# Altium PCB PCB2.PcbDoc
Units mm, origin at the board's own origin, x right, y up, seen from the top; angles counter-clockwise.
Board outline 90.55 x 93.75 mm, 2 copper layers (Top Layer, Bottom Layer); 34 components, 48 nets, 411 pads, 57 vias.
Unrouted connection lines stored in the file: 1.
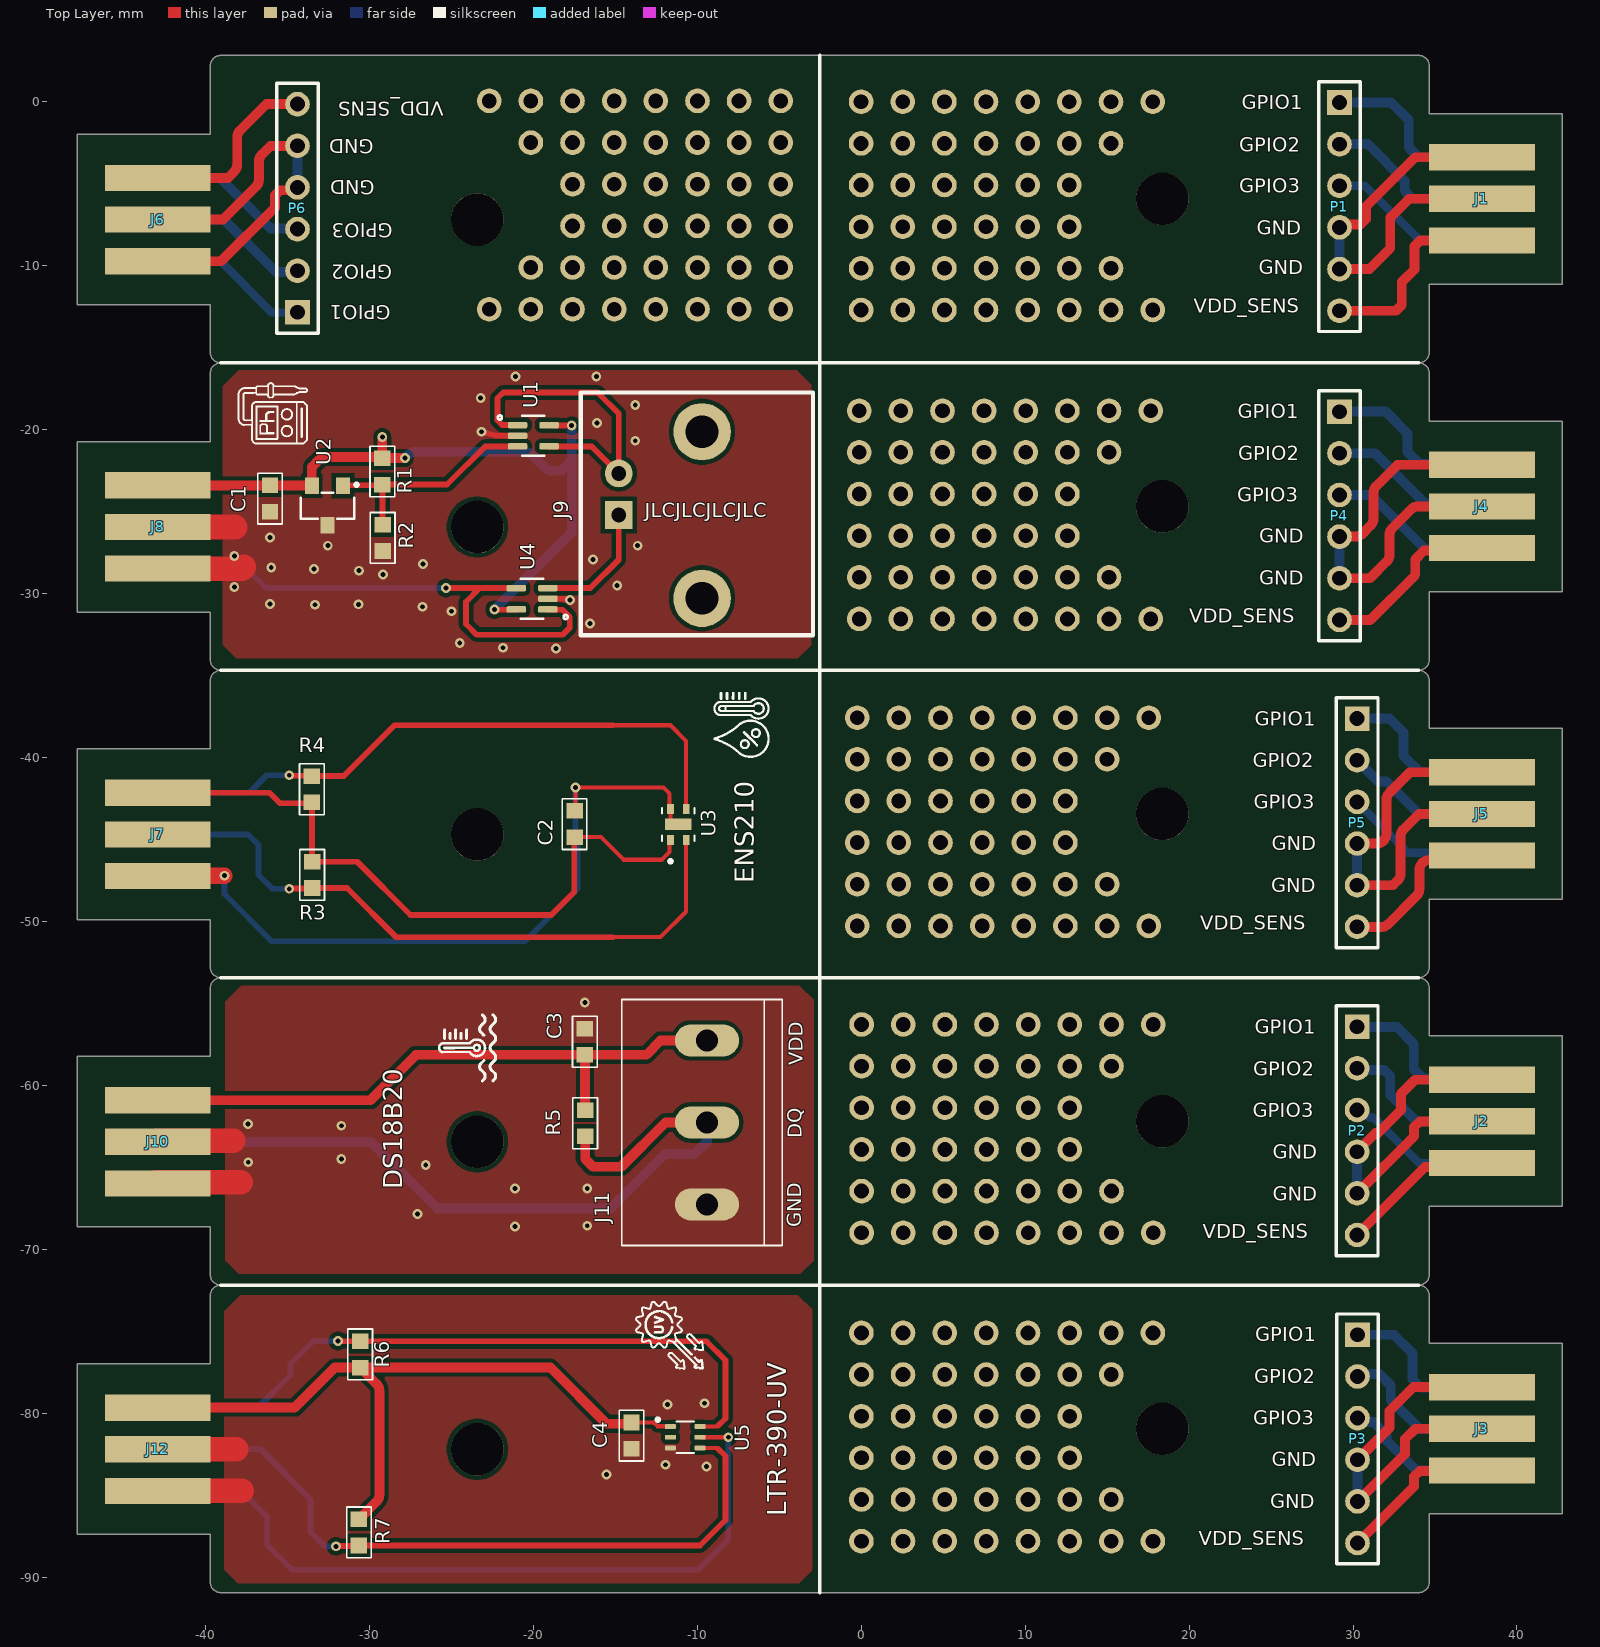
[diagram p0: Top Layer view]
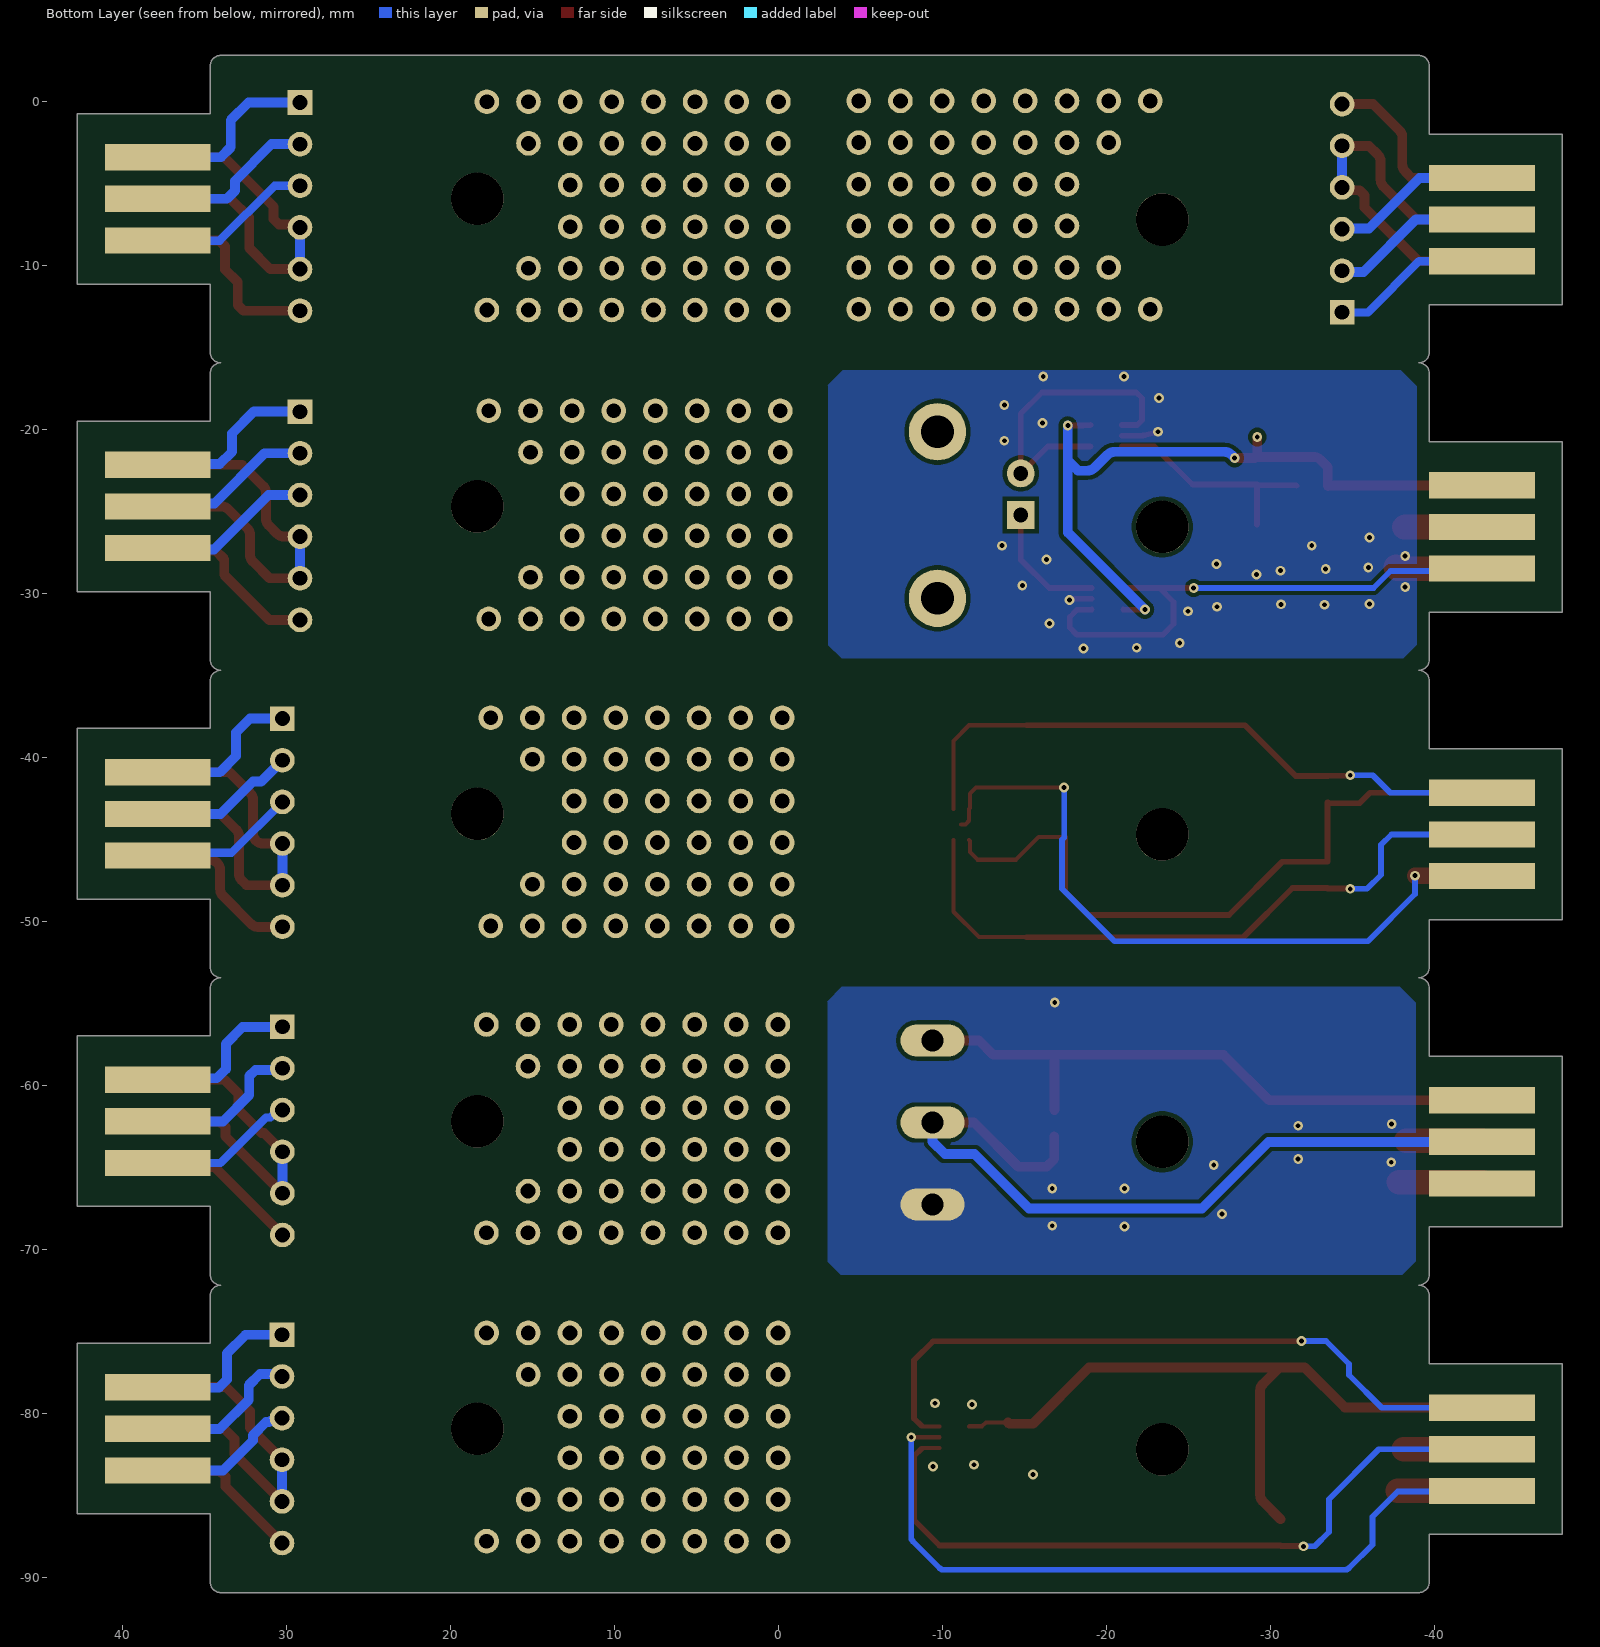
[diagram p1: Bottom Layer view, seen from below]
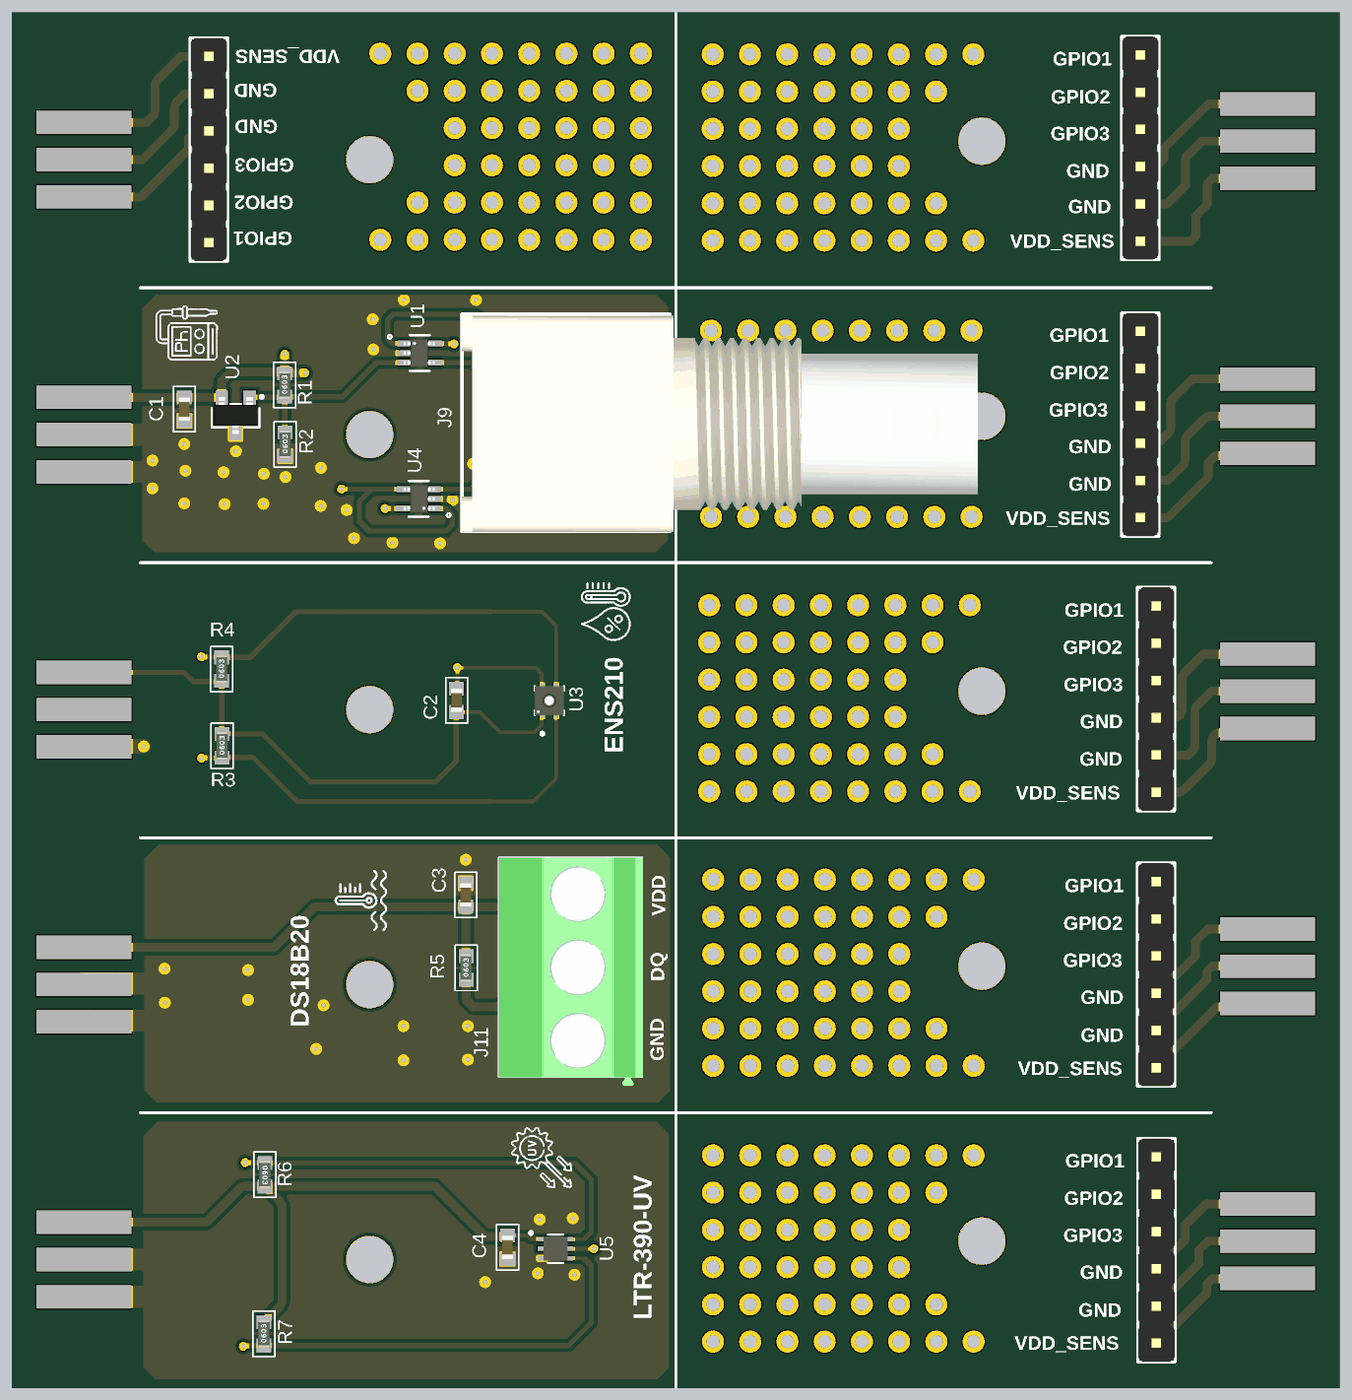
[diagram p2: 3D render of the assembled board from above, using the file's embedded part models]

## Layer stack, top to bottom
Top Solder: solder mask 0.0102, Solder Resist, Dk 3.5
Top Layer: signal copper 0.0356
Dielectric 1: dielectric 0.32, FR-4, Dk 4.8
Bottom Layer: signal copper 0.0356
Bottom Solder: solder mask 0.0102, Solder Resist, Dk 3.5

## Board outline
-47.796,-87.373 -39.696,-87.373 -39.696,-90.273 ccw(c-39.046,-90.273) -39.046,-90.923 -2.521,-90.923 34.004,-90.923 ccw(c34.004,-90.273) 34.654,-90.273 34.654,-86.123 42.754,-86.123 42.754,-75.723 34.654,-75.723 34.654,-72.823 ccw(c34.004,-72.823) 34.004,-72.173 ccw(c34.004,-71.523) 34.654,-71.523 34.654,-67.373 42.754,-67.373 42.754,-56.973 34.654,-56.973 34.654,-54.073 ccw(c34.004,-54.073) 34.004,-53.423 ccw(c34.004,-52.773) 34.654,-52.773 34.654,-48.623 42.754,-48.623 42.754,-38.223 34.654,-38.223 34.654,-35.323 ccw(c34.004,-35.323) 34.004,-34.673 ccw(c34.004,-34.023) 34.654,-34.023 34.654,-29.873 42.754,-29.873 42.754,-19.473 34.654,-19.473 34.654,-16.573 ccw(c34.004,-16.573) 34.004,-15.923 ccw(c34.004,-15.273) 34.654,-15.273 34.654,-11.123 42.754,-11.123 42.754,-0.723 34.654,-0.723 34.654,2.177 ccw(c34.004,2.177) 34.004,2.827 -2.521,2.827 -39.046,2.827 ccw(c-39.046,2.177) -39.696,2.177 -39.696,-1.973 -47.796,-1.973 -47.796,-12.373 -39.696,-12.373 -39.696,-15.273 ccw(c-39.046,-15.273) -39.046,-15.923 ccw(c-39.046,-16.573) -39.696,-16.573 -39.696,-20.723 -47.796,-20.723 -47.796,-31.123 -39.696,-31.123 -39.696,-34.023 ccw(c-39.046,-34.023) -39.046,-34.673 ccw(c-39.046,-35.323) -39.696,-35.323 -39.696,-39.473 -47.796,-39.473 -47.796,-49.873 -39.696,-49.873 -39.696,-52.773 ccw(c-39.046,-52.773) -39.046,-53.423 ccw(c-39.046,-54.073) -39.696,-54.073 -39.696,-58.223 -47.796,-58.223 -47.796,-68.623 -39.696,-68.623 -39.696,-71.523 ccw(c-39.046,-71.523) -39.046,-72.173 ccw(c-39.046,-72.823) -39.696,-72.823 -39.696,-76.973 -47.796,-76.973

## Design rules (kind name [scope] priority, off if disabled: settings)
Clearance [All] p1: gap=0.254 ignorepadtopadclearanceinfootprint=FALSE except(0: Arc-Hole Track-Hole SMDPad-Hole THPad-Hole Via-Hole Fill-Hole Poly-Hole Region-Hole Text-Hole)
PlaneConnect [All] p1: planeconnectstyle=Direct reliefexpansion=0.508 reliefentries=4 reliefconductorwidth=0.254 reliefairgap=0.254
PolygonConnect [All] p1: connectstyle=Direct reliefconductorwidth=0.254 reliefentries=4 polygonreliefangle="90 Angle" airgapwidth=0.254
RoutingVias [All] p1: holewidth=0.711 width=1.27 viastyle="Through Hole" minholewidth=0.711 minwidth=1.27 maxholewidth=0.711 maxwidth=1.27
SolderMaskExpansion [All] p1: expansion=0.102 istentingtop=FALSE
Width [All] p1: maxlimit=5 minlimit=0.2 preferedwidth=0.254 bottomlayer_minwidth=0.254 minimp=50.000000 maximp=50.000000 favimp=50.000000
29 further rules are at their usual default settings.

## Classes and differential pairs
component class Sensors: C1 C2 C3 C4 J7 J8 J9 J10 J11 J12 R1 R2 R3 R4 R5 R6 R7 U1 U2 U3 U4 U5
component class Blank: J1 J2 J3 J4 J5 J6 P1 P3 P4 P5 P6

## Components (designator, comment, footprint, x,y, rotation, side; value= is the part's Value field where it differs from the comment)
C1 "100nF" C0603 -36.05,-24.2 r90 top
C2 "100nF" C0603 -17.475,-44.05 r270 top
C3 "100nF" C0603 -16.85,-57.325 r270 top
C4 "100nF" C0603 -14,-81.35 r90 top
J1 "Card Edge" "CARD EDGE" 37.854,-5.92 r180 top
J2 "Card Edge" "CARD EDGE" 37.854,-62.183 r180 top
J3 "Card Edge" "CARD EDGE" 37.854,-80.933 r180 top
J4 "Card Edge" "CARD EDGE" 37.854,-24.683 r180 top
J5 "Card Edge" "CARD EDGE" 37.854,-43.433 r180 top
J6 "Card Edge" "CARD EDGE" -42.896,-7.183 r0 top
J7 "Card Edge" "CARD EDGE" -42.896,-44.683 r0 top
J8 "Card Edge" "CARD EDGE" -42.896,-25.933 r0 top
J9 "CON-BNC" CON_BNC_MOLEX_0731375003 -12.24,-25.205 r90 top
J10 "Card Edge" "CARD EDGE" -42.896,-63.433 r0 top
J11 "Pluggable_Connector" 5mm_screw_terminal_3_pos -9.4,-67.25 r90 top
J12 "Card Edge" "CARD EDGE" -42.896,-82.183 r0 top
P1 "Header 1X6" HEADER_1x6_2.54 29.175,-0.045 r270 top
P2 "Header 1X6" HEADER_1x6_2.54 30.25,-56.41 r270 top
P3 "Header 1X6" HEADER_1x6_2.54 30.275,-75.2 r270 top
P4 "Header 1X6" HEADER_1x6_2.54 29.175,-18.9 r270 top
P5 "Header 1X6" HEADER_1x6_2.54 30.25,-37.62 r270 top
P6 "Header 1X6" HEADER_1x6_2.54 -34.375,-12.845 r90 top
R1 "100k" R0603 -29.2,-22.55 r90 top
R2 "33.2k" R0603 -29.175,-26.6 r90 top
R3 "4.7k" R0603 -33.475,-47.15 r90 top
R4 "4.7k" R0603 -33.5,-41.925 r90 top
R5 "4k7" R0603 -16.825,-62.3 r90 top
R6 "4k7" R0603 -30.55,-76.4 r270 top
R7 "4k7" R0603 -30.625,-87.25 r90 top
U1 "LPV521" SOT65P210X110-5N -19.99,-20.37 r0 top
U2 "ADR5040BKSZ-REEL7" SOT23-3 -32.55,-24.625 r180 top
U3 "ENS210-LQFM" XDCR_ENS210-LQFM -11.15,-44.075 r90 top
U4 "LPV521" SOT65P210X110-5N -20.065,-30.311 r180 top
U5 "LTR-390UV-01" LTR390-UV -9.825,-80.8 r0 top

## Footprints (in the part's own frame and the unit in brackets; to place one, negate y for a bottom-side part, rotate by r counter-clockwise, add the part's x,y. Pads: shape width x height; smd on the part's side, far side on the other; paste and mask are expansions set on the pad)
5mm_screw_terminal_3_pos [mm]
  oval 1.95x3.9 hole 1.35: 1(0,0) 2(5,0) 3(10,0)
  silkscreen extent -2.5,-4.6 12.5,5.2, body extent -3.09,-4.64 12.48,5.21, height 13.9
C0603 [mm] "Chip Capacitor; Body 1.6 x 0.8 mm (LxW typ)"
  rect 0.95x1 smd mask+0.05: 1(-0.8,0) 2(0.8,0)
  silkscreen extent -1.55,-0.75 1.55,0.75, body extent -0.8,-0.4 0.8,0.4, height 0.8
"CARD EDGE" [mm]
  rect 6.46x1.6 smd far side: 1(0,-2.54) 2(0,0) 3(0,2.54)
  rect 6.46x1.6 smd: 4(0,2.54) 5(0,0) 6(0,-2.54)
CON_BNC_MOLEX_0731375003 [mm]
  rect 1.7x1.7 hole 0.9: 1(0,2.54)
  round 1.7 hole 0.9: 2(2.54,2.54)
  round 3.5 hole 2: MH(-5.08,-2.54) MH(5.08,-2.54)
  silkscreen extent -7.33,-9.3 7.47,4.86, body extent -7.38,-30.32 7.38,4.86, height 13.25
HEADER_1x6_2.54 [mm] "Connector; Header; 6 Position"
  rect 1.5x1.5 hole 0.9: 1(0,0)
  round 1.5 hole 0.9: 2(2.54,0) 3(5.08,0) 4(7.62,0) 5(10.16,0) 6(12.7,0)
  silkscreen extent -1.27,-1.27 13.97,1.27, body extent -1.27,-1.24 13.97,1.25, height 8.54
LTR390-UV [mm]
  rrect25% 0.65x0.3 smd: 1(-1.8,0) 2(-1.8,-0.65) 3(-1.8,-1.3) 4(0,-1.3) 5(0,-0.65) 6(0,0)
  silkscreen extent -2.67,-1.61 -0.37,0.52, body extent -1.73,-1.47 -0.08,0.18, height 0.7
R0603 [mm] "Chip Resistor; Body 1.6 x 0.8 mm (LxW typ)"
  rect 0.95x1 smd mask+0.05: 1(-0.8,0) 2(0.8,0)
  silkscreen extent -1.55,-0.75 1.55,0.75, body extent -1,-0.39 1,0.39, height 0.79
SOT23-3 [mm] "SOT-23; 3 Leads; Body 3.0 x 2.5 mm, inc. leads (LxW max)"
  rect 0.85x1 smd: 1(0.95,-1.2) 2(-0.95,-1.2) 3(0,1.2)
  silkscreen extent -1.88,-1.37 1.63,0.81, body extent -1.5,-1.25 1.5,1.25, height 1.05
SOT65P210X110-5N [mm]
  rrect50% 1.19x0.4 smd: 1(-0.96,0.65) 2(-0.96,0) 3(-0.96,-0.65) 4(0.96,-0.65) 5(0.96,0.65)
  silkscreen extent -2.17,-1.22 0.68,1.24, body extent -1.08,-1 1.02,1, height 1.1
XDCR_ENS210-LQFM [mm]
  rect 0.6x0.4 smd paste-0.05 mask+0.05: 1(-0.95,0.475) 2(-0.95,-0.475) 3(0.95,-0.475) 4(0.95,0.475)
  rect 0.7x1.6 smd paste-2 mask+0.05: 5(0,0)
  silkscreen extent -2.35,-1 1,1, body extent -1,-1 1,1, height 0.8

## Part data
C1 C2 C3 C4: library part CAP_0603, "Capacitor SMD 0603"
J1 J2 J3 J4 J5 J6 J7 J8 J10 J12: "Card Edge pads for 2.54 mm pitch edge connector"
J9: "RF Connector BNC Female 50 Ohms PCB TH Mount", Manufacturer="RF Solutions", Manufacturer Part Number=CON-SMA-EDGE-S
J11: "Screw terminal or plug terminal"
P1 P2 P3 P4 P5 P6: "Header,6-Pin, Single row", LatestRevisionDate=17-Jul-2002, LatestRevisionNote="Re-released for DXP Platform.", Publisher="Altium Limited"
R1 R2 R3 R4: library part RES_0603, "Resistor SMD 0603"
R5 R6 R7: library part RES_0805, "Resistor SMD 0805"
U1 U4: Package=None, Availability=Unavailable, MP=MAX4466EXK, Price=None
U2: library part VREF, "Voltage References 2.048 Low-Cost, Micropower, Low-Dropout, High-Output-Current, SOT23", Manufacturer="Maxim Integrated", Manufacturer Part Number=MAX6101EUR+T
U3: "Humidity/Temperature Sensor Digital Serial (2-Wire, I2C) 4-Pin QFN EP T/R", Package="NON STANDARD-5 ScioSense", Check_prices=https://www.snapeda.com/parts/ENS210-LQFM/ScioSense/view-part/?ref=eda, MF=ScioSense, MP=ENS210-LQFM, SnapEDA_Link=https://www.snapeda.com/parts/ENS210-LQFM/ScioSense/view-part/?ref=snap
U5: "SENSOR OPT ULTRAVIOLET 6PINS", Manufacturer_Name=Lite-On, Mouser Part Number=859-LTR390UV01, Arrow Part Number=LTR-390UV-01, Arrow Price/Stock=https://www.arrow.com/en/products/ltr-390uv-01/lite-on-technology?region=nac, Datasheet Link=https://www.arrow.com/en/products/ltr-390uv-01/lite-on-technology, Geometry.Height=0.9mm, Manufacturer_Part_Number=LTR-390UV-01, Mouser Price/Stock=https://www.mouser.co.uk/ProductDetail/Lite-On/LTR-390UV-01?qs=g5ciJ0jwZaECcUd5i6p7%252Bg%3D%3D

## Free pads (board coordinates)
  round 1.5 hole 0.9: 6(-4.9,-12.65) 6(-0.239,-37.563) 6(-0.119,-18.842) 6(0,0) 6(0.018,-75.083) 6(0.03,-56.274) 7(-4.9,-10.11) 7(-0.239,-40.103) 7(-0.119,-21.382) 7(0,-2.54) 7(0.018,-77.623) 7(0.03,-58.814) 8(-4.9,-7.57) 8(-0.239,-42.643) 8(-0.119,-23.922) 8(0,-5.08) 8(0.018,-80.163) 8(0.03,-61.354) 9(-4.9,-5.03) 9(-0.239,-45.183) 9(-0.119,-26.462) 9(0,-7.62) 9(0.018,-82.703) 9(0.03,-63.894) 10(-4.9,-2.49) 10(-0.239,-47.723) 10(-0.119,-29.002) 10(0,-10.16) 10(0.018,-85.243) 10(0.03,-66.434) 11(-4.9,0.05) 11(-0.239,-50.263) 11(-0.119,-31.542) 11(0,-12.7) 11(0.018,-87.783) 11(0.03,-68.974) 12(-7.44,-12.65) 12(2.301,-37.563) 12(2.421,-18.842) 12(2.54,0) 12(2.558,-75.083) 12(2.57,-56.274) 13(-7.44,-10.11) 13(2.301,-40.103) 13(2.421,-21.382) 13(2.54,-2.54) 13(2.558,-77.623) 13(2.57,-58.814) 14(-7.44,-7.57) 14(2.301,-42.643) 14(2.421,-23.922) 14(2.54,-5.08) 14(2.558,-80.163) 14(2.57,-61.354) 15(-7.44,-5.03) 15(2.301,-45.183) 15(2.421,-26.462) 15(2.54,-7.62) 15(2.558,-82.703) 15(2.57,-63.894) 16(-7.44,-2.49) 16(2.301,-47.723) 16(2.421,-29.002) 16(2.54,-10.16) 16(2.558,-85.243) 16(2.57,-66.434) 17(-7.44,0.05) 17(2.301,-50.263) 17(2.421,-31.542) 17(2.54,-12.7) 17(2.558,-87.783) 17(2.57,-68.974) 18(-9.98,0.05) 18(4.841,-50.263) 18(4.961,-31.542) 18(5.08,-12.7) 18(5.098,-87.783) 18(5.11,-68.974) 19(-9.98,-2.49) 19(4.841,-47.723) 19(4.961,-29.002) 19(5.08,-10.16) 19(5.098,-85.243) 19(5.11,-66.434) 20(-9.98,-5.03) 20(4.841,-45.183) 20(4.961,-26.462) 20(5.08,-7.62) 20(5.098,-82.703) 20(5.11,-63.894) 21(-9.98,-7.57) 21(4.841,-42.643) 21(4.961,-23.922) 21(5.08,-5.08) 21(5.098,-80.163) 21(5.11,-61.354) 22(-9.98,-10.11) 22(4.841,-40.103) 22(4.961,-21.382) 22(5.08,-2.54) 22(5.098,-77.623) 22(5.11,-58.814) 23(-9.98,-12.65) 23(4.841,-37.563) 23(4.961,-18.842) 23(5.08,0) 23(5.098,-75.083) 23(5.11,-56.274) 24(-12.52,-12.65) 24(7.381,-37.563) 24(7.501,-18.842) 24(7.62,0) 24(7.638,-75.083) 24(7.65,-56.274) 25(-12.52,-10.11) 25(7.381,-40.103) 25(7.501,-21.382) 25(7.62,-2.54) 25(7.638,-77.623) 25(7.65,-58.814) 26(-12.52,-7.57) 26(7.381,-42.643) 26(7.501,-23.922) 26(7.62,-5.08) 26(7.638,-80.163) 26(7.65,-61.354) 27(-12.52,-5.03) 27(7.381,-45.183) 27(7.501,-26.462) 27(7.62,-7.62) 27(7.638,-82.703) 27(7.65,-63.894) 28(-12.52,-2.49) 28(7.381,-47.723) 28(7.501,-29.002) 28(7.62,-10.16) 28(7.638,-85.243) 28(7.65,-66.434) 29(-12.52,0.05) 29(7.381,-50.263) 29(7.501,-31.542) 29(7.62,-12.7) 29(7.638,-87.783) 29(7.65,-68.974) 30(-15.06,0.05) 30(9.921,-50.263) 30(10.041,-31.542) 30(10.16,-12.7) 30(10.178,-87.783) 30(10.19,-68.974) 31(-15.06,-2.49) 31(9.921,-47.723) 31(10.041,-29.002) 31(10.16,-10.16) 31(10.178,-85.243) 31(10.19,-66.434) 32(-15.06,-5.03) 32(9.921,-45.183) 32(10.041,-26.462) 32(10.16,-7.62) 32(10.178,-82.703) 32(10.19,-63.894) 33(-15.06,-7.57) 33(9.921,-42.643) 33(10.041,-23.922) 33(10.16,-5.08) 33(10.178,-80.163) 33(10.19,-61.354) 35(-15.06,-10.11) 35(9.921,-40.103) 35(10.041,-21.382) 35(10.16,-2.54) 35(10.178,-77.623) 35(10.19,-58.814) 36(-15.06,-12.65) 36(9.921,-37.563) 36(10.041,-18.842) 36(10.16,0) 36(10.178,-75.083) 36(10.19,-56.274) 37(-17.6,-12.65) 37(12.461,-37.563) 37(12.581,-18.842) 37(12.7,0) 37(12.718,-75.083) 37(12.73,-56.274) 38(-17.6,-10.11) 38(12.461,-40.103) 38(12.581,-21.382) 38(12.7,-2.54) 38(12.718,-77.623) 38(12.73,-58.814) 39(-17.6,-7.57) 39(12.461,-42.643) 39(12.581,-23.922) 39(12.7,-5.08) 39(12.718,-80.163) 39(12.73,-61.354) 40(-17.6,-5.03) 40(12.461,-45.183) 40(12.581,-26.462) 40(12.7,-7.62) 40(12.718,-82.703) 40(12.73,-63.894) 42(-17.6,-2.49) 42(12.461,-47.723) 42(12.581,-29.002) 42(12.7,-10.16) 42(12.718,-85.243) 42(12.73,-66.434) 43(-17.6,0.05) 43(12.461,-50.263) 43(12.581,-31.542) 43(12.7,-12.7) 43(12.718,-87.783) 43(12.73,-68.974) 44(-20.14,0.05) 44(15.001,-50.263) 44(15.121,-31.542) 44(15.24,-12.7) 44(15.258,-87.783) 44(15.27,-68.974) 45(-20.14,-2.49) 45(15.001,-47.723) 45(15.121,-29.002) 45(15.24,-10.16) 45(15.258,-85.243) 45(15.27,-66.434) 49(-20.14,-10.11) 49(15.001,-40.103) 49(15.121,-21.382) 49(15.24,-2.54) 49(15.258,-77.623) 49(15.27,-58.814) 50(-20.14,-12.65) 50(15.001,-37.563) 50(15.121,-18.842) 50(15.24,0) 50(15.258,-75.083) 50(15.27,-56.274) 52(-22.68,-12.65) 52(17.541,-37.563) 52(17.661,-18.842) 52(17.78,0) 52(17.798,-75.083) 52(17.81,-56.274) 57(-22.68,0.05) 57(17.541,-50.263) 57(17.661,-31.542) 57(17.78,-12.7) 57(17.798,-87.783) 57(17.81,-68.974)
  round 3.2 hole 3.2: 59(-23.408,-7.183) 60(-23.408,-25.933) 61(-23.408,-44.683) 62(-23.408,-63.433) 63(-23.408,-82.183) 65(18.365,-5.92) 66(18.365,-24.683) 67(18.365,-43.433) 68(18.365,-62.183) 69(18.365,-80.933)

## Via types
v1: diameter 0.6, hole 0.3, Top Layer to Bottom Layer, 57 vias

## Nets (pads, with @x,y where several pads share a name; then routed paths per layer and width w, separated by ;. In a path a pad name is that pad's centre, name@x,y a point inside that pad or via, vN(x,y) a via of type N, cw(c..) or ccw(c..) an arc to the next point about the centre after c; other vN are vias at no path point)
DQ: J10.2 J11.2 R5.1 | length 48.2
  Top Layer w0.6: R5.1 -16.825,-64.475 -16.35,-64.95 -14.625,-64.95 -11.925,-62.25 J11.2
  Bottom Layer w0.6: J10.2 -29.892,-63.433 -25.825,-67.5 -15.275,-67.5 -11.95,-64.175 -10.15,-64.175 -9.4,-63.425 J11.2
GND_EXP1: J1.5 J1.6 P1.4 P1.5 | length 25
  Top Layer w0.6: P1.5 30.995,-10.205 32.275,-8.925 32.275,-7.05 33.405,-5.92 J1.5 ; P1.4 29.347,-7.493 30.449,-7.493 30.8,-7.141 30.8,-6.4 33.82,-3.38 J1.6
  Bottom Layer w0.6: P1.5 P1.4
GND_EXP2: J2.5 J2.6 P2.4 P2.5 | length 22.3
  Top Layer w0.6: P2.5 33.725,-63.095 33.725,-62.534 34.076,-62.183 J2.5 ; P2.4 31.38,-62.9 31.525,-62.9 32.925,-61.5 32.925,-60.5 33.782,-59.643 J2.6
  Bottom Layer w0.6: P2.5 P2.4
GND_EXP3: J3.5 J3.6 P3.4 P3.5 | length 22.5
  Top Layer w0.6: P3.5 33.175,-82.46 33.175,-81.55 33.792,-80.933 J3.5 ; P3.4 32.225,-80.87 32.225,-79.85 33.682,-78.393 J3.6
  Bottom Layer w0.6: P3.5 P3.4
GND_EXP4: J4.5 J4.6 P4.4 P4.5 | length 25.6
  Top Layer w0.6: P4.5 31.04,-29.06 32.049,-28.051 ccw(c31.625,-27.626) 32.225,-27.626 32.225,-26.424 cw(c32.825,-26.424) 32.401,-25.999 33.542,-24.858 cw(c33.966,-25.283) 33.966,-24.683 J4.5 ; P4.4 30.156,-26.52 ccw(c30.156,-25.92) 30.58,-26.345 31.074,-25.851 ccw(c30.65,-25.426) 31.25,-25.426 31.25,-23.849 cw(c31.85,-23.849) 31.426,-23.424 32.707,-22.143 J4.6
  Bottom Layer w0.6: P4.5 P4.4
GND_EXP5: J5.5 J5.6 P5.4 P5.5 | length 24.3
  Top Layer w0.6: P5.5 32.445,-47.78 32.724,-47.501 ; P5.4 31.435,-45.24 ccw(c31.435,-44.64) 32.035,-44.64 32.035,-42.589 cw(c32.635,-42.589) 32.211,-42.164 33.482,-40.893 J5.6 ; 32.724,-47.501 ccw(c32.3,-47.076) 32.9,-47.076 32.9,-44.799 cw(c33.5,-44.799) 33.076,-44.374 34.017,-43.433 J5.5
  Bottom Layer w0.6: P5.5 P5.4
GND_EXP6: J6.5 J6.6 P6.4 P6.5 | length 24.6
  Top Layer w0.6: J6.6 -39.023,-9.723 -35.75,-6.45 -35.75,-5.7 -35.447,-5.397 -34.547,-5.397 P6.4 ; J6.5 -38.908,-7.183 -36.901,-5.176 ccw(c-37.325,-4.751) -36.725,-4.751 -36.725,-3.649 cw(c-36.125,-3.649) -36.549,-3.224 -36.025,-2.7 -34.39,-2.7 P6.5
  Bottom Layer w0.6: P6.4 P6.5
GND_SENS1: C1.1 J8.5 J8.6 R2.1 U1.2 U2.3 U4.2 | length 13.6
  Top Layer w0.35: v1(-23.15,-20.125) -22.248,-20.359 ccw(c-22.16,-20.02) -22.16,-20.37 U1.2 ; U4.2 -17.897,-30.311 -17.818,-30.39 v1(-17.75,-30.39)
  Top Layer w1.5: J8.6 -37.748,-28.473 -37.65,-28.375 ; J8.5 -38.192,-25.933 -38.175,-25.95
  other v1: -18.6,-33.35 -21.85,-33.3 -24.475,-33 -16.525,-31.825 -24.975,-31.075 -26.75,-30.8 -33.3,-30.675 -30.65,-30.65 -36.05,-30.625 -38.225,-29.6 -14.875,-29.5 -29.15,-28.825 -30.625,-28.6 -33.375,-28.5 -35.975,-28.4 -26.725,-28.2 -16.35,-27.925 -38.225,-27.7 -32.525,-27.075 -13.625,-27.075 -36.05,-26.575 -13.775,-20.675 -16.1,-19.6 -13.775,-18.5 -23.2,-18.075 -21.075,-16.75 -16.15,-16.75
GND_SENS3: C2.1 J7.5 J7.6 U3.4 U3.5 | length 45.1
  Top Layer w0.25: C2.1 -17.425,-43.2 v1(-17.425,-41.825) -12.05,-41.825 -11.675,-42.2 -11.675,-43.075 U3.4 -11.625,-43.85 -11.4,-44.075 U3.5
  Top Layer w1: J7.6 -42.874,-47.2 v1(-38.825,-47.2)
  Bottom Layer w0.35: v1(-38.825,-47.2) -38.825,-48.325 -35.95,-51.2 -20.5,-51.2 -17.3,-48 -17.3,-45.009 -17.425,-44.884 v1(-17.425,-41.825)
GND_SENS4: C3.1 J10.5 J10.6 J11.1 | length 9.9
  Top Layer w1.5: J10.6@-42.996,-65.898 -37.848,-65.898 ; J10.5@-42.996,-63.358 -38.292,-63.358
  other v1: -21.1,-68.6 -16.7,-68.55 -27.05,-67.825 -21.1,-66.275 -16.7,-66.275 -26.55,-64.85 -37.375,-64.675 -31.7,-64.475 -31.7,-62.45 -37.4,-62.35 -16.85,-54.925
GND_SENS5: C4.1 J12.5 J12.6 U5.3 | length 9.9
  Top Layer w1.5: J12.6 -37.776,-84.723 ; J12.5 -38.125,-82.183
  other v1: -15.525,-83.725 -9.425,-83.225 -11.925,-83.125 -11.8,-79.45 -9.55,-79.375
GPIO1_EXP1: J1.1 P1.1 | length 11
  Bottom Layer w0.6: P1.1 32.32,-0.045 33.4,-1.125 33.4,-2.775 34.005,-3.38 J1.1
GPIO1_EXP2: J2.1 P2.1 | length 9.9
  Bottom Layer w0.6: P2.1 30.265,-56.425 32.675,-56.425 33.7,-57.45 33.7,-59 34.25,-59.55 37.761,-59.55 J2.1
GPIO1_EXP3: J3.1 P3.1 | length 9.9
  Bottom Layer w0.6: P3.1 32.5,-75.2 33.625,-76.325 33.625,-77.925 34.125,-78.425 37.821,-78.425 J3.1
GPIO1_EXP4: J4.1 P4.1 | length 10.7
  Bottom Layer w0.6: P4.1 31.999,-18.9 33.325,-20.226 33.325,-21.35 34.075,-22.1 37.811,-22.1 J4.1
GPIO1_EXP5: J5.1 P5.1 | length 9.8
  Bottom Layer w0.6: P5.1 32.22,-37.62 33.075,-38.475 33.075,-39.9 34.068,-40.893 J5.1
GPIO1_EXP6: J6.1 P6.1 | length 9.8
  Bottom Layer w0.5: J6.1 -39.077,-9.723 -35.95,-12.85 -34.38,-12.85 P6.1
GPIO2_EXP1: J1.2 P1.2 | length 10.4
  Bottom Layer w0.6: P1.2 30.91,-2.585 33.15,-4.825 33.15,-5.425 33.645,-5.92 J1.2
GPIO2_EXP2: J2.2 P2.2 | length 9.6
  Bottom Layer w0.6: P2.2 30.351,-59.051 31.9,-59.051 32.275,-59.426 32.275,-60.575 33.883,-62.183 J2.2
GPIO2_EXP3: J3.2 P3.2 | length 9.6
  Bottom Layer w0.6: P3.2 30.415,-77.6 31.625,-77.6 32.3,-78.275 32.3,-79.175 34.075,-80.95 37.836,-80.95 J3.2
GPIO2_EXP4: J4.2 P4.2 | length 10
  Bottom Layer w0.6: P4.2 31.34,-21.44 34.4,-24.5 37.671,-24.5 J4.2
GPIO2_EXP5: J5.2 P5.2 | length 9
  Bottom Layer w0.6: P5.2 31.54,-41.45 32.05,-41.45 34.033,-43.433 J5.2
GPIO2_EXP6: J6.2 P6.2 | length 9.9
  Bottom Layer w0.6: J6.2 -38.867,-7.183 -35.675,-10.375 -34.445,-10.375 P6.2
GPIO3_EXP1: J1.3 P1.3 | length 10.1
  Bottom Layer w0.5: P1.3 30.725,-5.125 34.075,-8.475 37.839,-8.475 J1.3
GPIO3_EXP2: J2.3 P2.3 | length 8.9
  Bottom Layer w0.5: P2.3 30.521,-61.49 30.981,-61.95 31.25,-61.95 34.023,-64.723 J2.3
GPIO3_EXP3: J3.3 P3.3 | length 9.1
  Bottom Layer w0.6: P3.3 30.447,-80.452 30.977,-80.452 31.05,-80.525 31.25,-80.525 32.05,-81.325 32.05,-81.65 33.873,-83.473 J3.3
GPIO3_EXP4: J4.3 P4.3 | length 10.1
  Bottom Layer w0.6: P4.3 31.105,-23.98 34.425,-27.3 37.776,-27.3 J4.3
GPIO3_EXP5: J5.3 P5.3 | length 9
  Bottom Layer w0.5: P5.3 33.35,-45.8 37.681,-45.8 J5.3
GPIO3_EXP6: J6.3 P6.3 | length 9.8
  Bottom Layer w0.6: J6.3 -39.107,-4.643 -36.025,-7.725 -34.415,-7.725 P6.3
INT: J12.1 U5.5 | length 46.5
  Top Layer w0.25: U5.5 v1(-8.1,-81.45)
  Bottom Layer w0.35: J12.1 -42.869,-84.75 -37.775,-84.75 -36.225,-86.3 -36.225,-88 -34.803,-89.422 ccw(c-34.555,-89.175) -34.555,-89.525 -10.07,-89.525 ccw(c-10.07,-89.175) -9.823,-89.423 -8.202,-87.802 ccw(c-8.45,-87.555) -8.1,-87.555 v1(-8.1,-81.45)
NetJ9_1: J9.1 U4.3 | length 7.8
  Top Layer w0.35: U4.3 -16.514,-29.661 -14.78,-27.927 J9.1
NetJ9_2: J9.2 U1.1 U1.4 | length 19.3
  Top Layer w0.35: U1.1 -21.88,-19.72 -22.175,-19.425 -22.175,-18.075 -21.825,-17.725 -16.075,-17.725 -14.78,-19.02 J9.2 -16.425,-21.02 U1.4
NetR1_1: R1.1 R2.2 U1.3 U2.2 | length 14.1
  Top Layer w0.35: U2.2 -31.563,-23.388 -29.238,-23.388 R1.1 ; R2.2 -29.187,-25.787 -29.187,-23.363 R1.1 ; U1.3 -22.92,-21.02 -25.25,-23.35 R1.1
PH: J8.1 U4.1 U4.4 | length 33.8
  Top Layer w0.35: v1(-25.325,-29.65) -25.314,-29.661 -23.261,-29.661 ; U4.4 -23.261,-29.661 ; U4.1 -19.08,-30.986 -18.214,-30.986 -17.775,-31.425 -17.775,-32.075 -18.2,-32.5 -23.45,-32.5 -24.1,-31.85 -24.1,-30.5 -23.261,-29.661
  Bottom Layer w0.35: J8.1 -42.744,-28.625 -37.325,-28.625 -36.3,-29.65 v1(-25.325,-29.65)
SCL_1: J7.2 R3.1 U3.2 | length 41
  Top Layer w0.25: -15.125,-50.95 -12.225,-50.95 -10.675,-49.4 U3.2
  Top Layer w0.35: v1(-34.875,-48) -34.85,-47.975 -33.5,-47.975 R3.1 -31.35,-47.95 -28.35,-50.95 -15.125,-50.95
  Bottom Layer w0.35: J7.2 -37.383,-44.683 -36.75,-45.316 -36.75,-47.15 -35.9,-48 v1(-34.875,-48)
SCL_2: J12.2 R7.1 U5.4 | length 44.6
  Top Layer w0.25: U5.4 -8.775,-82.1 -8.725,-82.15
  Top Layer w0.35: v1(-32.025,-88.1) -32,-88.075 -30.65,-88.075 R7.1 -9.825,-88.05 -8.275,-86.5 -8.275,-82.6 -8.725,-82.15
  Bottom Layer w0.35: J12.2 -36.617,-82.183 -33.575,-85.225 -33.575,-87.225 -32.706,-88.094 -32.031,-88.094 v1(-32.025,-88.1)
SDA_1: J7.3 R4.2 U3.3 | length 38.5
  Top Layer w0.25: -15.15,-38.025 -11.625,-38.025 -10.675,-38.975 U3.3
  Top Layer w0.35: v1(-34.875,-41.075) -34.85,-41.1 -33.525,-41.1 R4.2 -31.55,-41.125 -28.45,-38.025 -15.15,-38.025
  Bottom Layer w0.35: J7.3 -37.318,-42.143 -36.25,-41.075 v1(-34.875,-41.075)
SDA_2: J12.3 R6.1 U5.6 | length 42.5
  Top Layer w0.25: U5.6 -8.775,-80.8 -8.725,-80.75
  Top Layer w0.35: v1(-31.9,-75.575) -31.888,-75.587 -30.562,-75.587 R6.1 -9.425,-75.6 -8.275,-76.75 -8.275,-80.3 -8.725,-80.75
  Bottom Layer w0.35: J12.3 -36.793,-79.643 -34.8,-77.65 -34.8,-76.975 -33.4,-75.575 v1(-31.9,-75.575)
VDD_SENS1: C1.2 J8.4 R1.2 U1.5 U2.1 U4.5 | length 44.6
  Top Layer w0.35: v1(-22.35,-30.975) -21.445,-30.975 U4.5 ; U1.5 -18.61,-19.745 v1(-17.65,-19.75)
  Top Layer w0.6: J8.4 -42.893,-23.396 -36.054,-23.396 C1.2 -36.037,-23.413 -33.513,-23.413 U2.1 -33.5,-22.275 -33.056,-21.831 cw(c-32.632,-22.256) -32.632,-21.656 -29.281,-21.656 R1.2@-29.2,-21.575 ; v1(-29.2,-20.45) R1.2@-29.2,-21.575 ; v1(-27.825,-21.725) -29.05,-21.725 R1.2@-29.2,-21.575
  Bottom Layer w0.6: v1(-27.825,-21.725) -27.625,-21.525 cw(c-27.201,-21.95) -27.201,-21.35 -20.499,-21.35 cw(c-20.499,-21.95) -20.073,-21.527 -19.276,-22.324 ccw(c-18.851,-21.9) -18.851,-22.5 -18.275,-22.5 -17.65,-21.875 ; v1(-22.35,-30.975) -17.65,-26.275 -17.65,-21.875 ; v1(-17.65,-19.75) -17.65,-21.875
VDD_SENS3: C2.2 J7.4 R3.2 R4.1 U3.1 | length 41.9
  Top Layer w0.25: C2.2 -15.875,-44.85 -14.5,-46.225 -12.15,-46.225 -11.675,-45.75 -11.675,-45.075 U3.1
  Top Layer w0.35: J7.4 -36.082,-42.143 -35.45,-42.775 -33.55,-42.775 R4.1 -33.487,-42.738 -33.487,-46.337 R3.2 -30.725,-46.35 -27.475,-49.6 -18.9,-49.6 -17.5,-48.2 -17.5,-44.875 C2.2
VDD_SENS4: C3.2 J10.4 J11.3 R5.2 | length 38.4
  Top Layer w0.6: J10.4 -29.918,-60.893 -27.15,-58.125 C3.2 ; R5.2 -16.837,-61.487 -16.837,-58.138 C3.2 ; J11.3 -12.225,-57.25 -13.1,-58.125 C3.2
VDD_SENS5: C4.2 J12.4 R6.2 R7.2 U5.1 | length 44
  Top Layer w0.25: C4.2 -12.65,-80.55 -12.425,-80.775 -11.65,-80.775 U5.1
  Top Layer w0.6: J12.4 -34.543,-79.643 -32.1,-77.2 R6.2 ; R7.2 -29.55,-85.375 ccw(c-29.975,-84.951) -29.375,-84.951 -29.375,-78.624 ccw(c-29.975,-78.624) -29.55,-78.2 -30.375,-77.375 R6.2 ; C4.2 -14.075,-80.625 -15.525,-80.625 -18.95,-77.2 R6.2
VDD_SENS_EXP1: J1.4 P1.6 | length 12.1
  Top Layer w0.6: P1.6 32.624,-12.745 32.975,-12.394 32.975,-11 33.75,-10.225 33.75,-8.812 34.101,-8.46 J1.4
VDD_SENS_EXP2: J2.4 P2.6 | length 9.4
  Top Layer w0.6: P2.6 34.4,-64.96 37.616,-64.96 J2.4
VDD_SENS_EXP3: J3.4 P3.6 | length 9.8
  Top Layer w0.6: P3.6 33.725,-84.45 33.725,-83.85 34.076,-83.499 37.828,-83.499 J3.4
VDD_SENS_EXP4: J4.4 P4.6 | length 11
  Top Layer w0.6: P4.6 31.05,-31.6 33.8,-28.85 33.8,-27.9 34.325,-27.375 37.701,-27.375 J4.4
VDD_SENS_EXP5: J5.4 P5.6 | length 10.3
  Top Layer w0.6: P5.6 31.731,-50.32 ccw(c31.731,-49.72) 32.155,-50.145 33.875,-48.425 ccw(c33.45,-48.001) 34.05,-48.001 34.05,-46.851 cw(c34.65,-46.851) 34.65,-46.251 37.575,-46.251 J5.4
VDD_SENS_EXP6: J6.4 P6.6 | length 11.6
  Top Layer w0.6: J6.4 -38.618,-4.643 -38.226,-4.251 ccw(c-38.65,-3.826) -38.05,-3.826 -38.05,-2.174 cw(c-37.45,-2.174) -37.874,-1.749 -36.27,-0.145 P6.6
pads on no net: J7.1 J8.2 J8.3 J9.MH J10.1 J10.3 U5.2

## Polygon pours and split planes (outlines as drawn)
GND_SENS4 on Bottom Layer "GND_SENS4_L02_P005" (solid, pour order 5): -38.875,-62.3 -38.875,-54.95 -37.9,-53.975 -3.874,-53.975 -2.972,-54.877 -3,-54.906 -3,-70.75 -3.8,-71.55 -38.05,-71.55 -38.875,-70.725
GND_SENS1 on Bottom Layer "GND_SENS1_L02_P000" (solid, pour order 0): -38.925,-24.7 -38.925,-17.35 -37.95,-16.375 -3.924,-16.375 -3.022,-17.277 -3.05,-17.306 -3.05,-33.15 -3.85,-33.95 -38.1,-33.95 -38.925,-33.125
GND_SENS5 on Top Layer "GND_SENS5_L01_P004" (solid, pour order 4): -38.85,-81.1 -38.85,-73.75 -37.875,-72.775 -3.849,-72.775 -2.947,-73.677 -2.975,-73.706 -2.975,-89.55 -3.775,-90.35 -38.025,-90.35 -38.85,-89.525
GND_SENS4 on Top Layer "GND_SENS4_L01_P003" (solid, pour order 3): -38.775,-62.225 -38.775,-54.875 -37.8,-53.9 -3.774,-53.9 -2.872,-54.802 -2.9,-54.831 -2.9,-70.675 -3.7,-71.475 -37.95,-71.475 -38.775,-70.65
GND_SENS1 on Top Layer "GND_SENS1_L01_P001" (solid, pour order 1): -38.925,-24.7 -38.925,-17.35 -37.95,-16.375 -3.924,-16.375 -3.022,-17.277 -3.05,-17.306 -3.05,-33.15 -3.85,-33.95 -38.1,-33.95 -38.925,-33.125

## Silkscreen, mask and mechanical layers (free items; w line width, h text height)
Top Overlay:
  drawing of 47 lines, arcs and shapes, not listed
  text "VDD_SENS" at -25.45,0.31 h1.5 r180
  text "GPIO1" at 23.2,-0.757 h1.5
  text "GND" at -29.725,-1.993 h1.5 r180
  text "GPIO2" at 23.075,-3.357 h1.5
  text "GND" at -29.675,-4.468 h1.5 r180
  text "GPIO3" at 23.05,-5.857 h1.5
  text "GPIO3" at -28.575,-7.093 h1.5 r180
  text "GND" at 24.125,-8.407 h1.5
  text "GPIO2" at -28.6,-9.643 h1.5 r180
  text "GND" at 24.25,-10.832 h1.5
  text "GPIO1" at -28.675,-12.093 h1.5 r180
  text "VDD_SENS" at 20.275,-13.185 h1.5
  text "GPIO1" at 22.975,-19.607 h1.5
  text "GPIO2" at 23,-22.157 h1.5
  text "GPIO3" at 22.925,-24.707 h1.5
  text "JLCJLCJLCJLC" at -13.203,-25.658 h1.5
  text "GND" at 24.275,-27.207 h1.5
  text "GND" at 24.275,-29.757 h1.5
  text "VDD_SENS" at 20,-32.085 h1.5
  text "GPIO1" at 24,-38.357 h1.5
  text "GPIO2" at 23.9,-40.882 h1.5
  text "GPIO3" at 23.95,-43.432 h1.5
  text "GND" at 25.05,-45.957 h1.5
  text "ENS210" at -6.149,-47.65 h2 r90
  text "GND" at 25.025,-48.507 h1.5
  text "VDD_SENS" at 20.675,-50.81 h1.5
  text "GPIO1" at 24,-57.132 h1.5
  text "VDD" at -3.25,-58.75 h1.5 r90
  text "GPIO2" at 23.925,-59.707 h1.5
  text "GPIO3" at 23.9,-62.232 h1.5
  text "DQ" at -3.323,-63.2 h1.5 r90
  text "GND" at 25.1,-64.757 h1.5
  text "DS18B20" at -27.574,-66.325 h2 r90
  text "GND" at 25.1,-67.332 h1.5
  text "GND" at -3.343,-68.65 h1.5 r90
  text "VDD_SENS" at 20.825,-69.61 h1.5
  text "GPIO1" at 24.05,-75.907 h1.5
  text "GPIO2" at 23.975,-78.457 h1.5
  text "GPIO3" at 23.925,-80.982 h1.5
  text "GND" at 25.05,-83.507 h1.5
  text "GND" at 24.95,-86.082 h1.5
  text "LTR-390-UV" at -4.174,-86.275 h2 r90
  text "VDD_SENS" at 20.6,-88.335 h1.5
Mechanical 1:
  lines w0.2: -47.796,-87.373 -39.696,-87.373 -39.696,-90.273 ccw(c-39.046,-90.273) -39.046,-90.923 -2.521,-90.923 34.004,-90.923 ccw(c34.004,-90.273) 34.654,-90.273 34.654,-86.123 42.754,-86.123 42.754,-80.923 42.754,-75.723 34.654,-75.723 34.654,-72.823 ccw(c34.004,-72.823) 34.004,-72.173 ccw(c34.004,-71.523) 34.654,-71.523 34.654,-67.373 42.754,-67.373 42.754,-62.173 42.754,-56.973 34.654,-56.973 34.654,-54.073 ccw(c34.004,-54.073) 34.004,-53.423 ccw(c34.004,-52.773) 34.654,-52.773 34.654,-48.623 42.754,-48.623 42.754,-43.423 42.754,-38.223 34.654,-38.223 34.654,-35.323 ccw(c34.004,-35.323) 34.004,-34.673 ccw(c34.004,-34.023) 34.654,-34.023 34.654,-29.873 42.754,-29.873 42.754,-24.673 42.754,-19.473 34.654,-19.473 34.654,-16.573 ccw(c34.004,-16.573) 34.004,-15.923 ccw(c34.004,-15.273) 34.654,-15.273 34.654,-11.123 42.754,-11.123 42.754,-5.923 42.754,-0.723 34.654,-0.723 34.654,2.177 ccw(c34.004,2.177) 34.004,2.827 -2.521,2.827 -39.046,2.827 ccw(c-39.046,2.177) -39.696,2.177 -39.696,-1.973 -47.796,-1.973 -47.796,-7.173 -47.796,-12.373 -39.696,-12.373 -39.696,-15.273 ccw(c-39.046,-15.273) -39.046,-15.923 ccw(c-39.046,-16.573) -39.696,-16.573 -39.696,-20.723 -47.796,-20.723 -47.796,-25.923 -47.796,-31.123 -39.696,-31.123 -39.696,-34.023 ccw(c-39.046,-34.023) -39.046,-34.673 ccw(c-39.046,-35.323) -39.696,-35.323 -39.696,-39.473 -47.796,-39.473 -47.796,-44.673 -47.796,-49.873 -39.696,-49.873 -39.696,-52.773 ccw(c-39.046,-52.773) -39.046,-53.423 ccw(c-39.046,-54.073) -39.696,-54.073 -39.696,-58.223 -47.796,-58.223 -47.796,-63.423 -47.796,-68.623 -39.696,-68.623 -39.696,-71.523 ccw(c-39.046,-71.523) -39.046,-72.173 ccw(c-39.046,-72.823) -39.696,-72.823 -39.696,-76.973 -47.796,-76.973 -47.796,-82.173 -47.796,-87.373
Mechanical 15:
  lines w0.2: -42.896,-82.183 -42.896,-76.995 ; -42.896,-63.433 -42.896,-58.245 ; -42.896,-39.495 -42.896,-44.683 -23.408,-44.683 ; -42.896,-20.745 -42.896,-25.933 -23.408,-25.933 ; -42.896,-1.995 -42.896,-7.183 -23.408,-7.183 ; 18.365,-80.933 37.854,-80.933 37.854,-75.745 ; 18.365,-62.183 37.854,-62.183 37.854,-56.995 ; 18.365,-43.433 37.854,-43.433 37.854,-38.245 ; 18.365,-24.683 37.854,-24.683 37.854,-19.495 ; 18.365,-5.92 37.854,-5.92 37.854,-0.733

## Text inside footprints (layer, text, board x,y; h text height)
J1: Mechanical 15 "PCB Edge" at 41.611,-2.831 h1.5 r270
J2: Mechanical 15 "PCB Edge" at 41.611,-59.093 h1.5 r270
J3: Mechanical 15 "PCB Edge" at 41.611,-77.843 h1.5 r270
J4: Mechanical 15 "PCB Edge" at 41.611,-21.593 h1.5 r270
J5: Mechanical 15 "PCB Edge" at 41.611,-40.343 h1.5 r270
J6: Mechanical 15 "PCB Edge" at -46.654,-10.273 h1.5 r90
J7: Mechanical 15 "PCB Edge" at -46.654,-47.772 h1.5 r90
J8: Mechanical 15 "PCB Edge" at -46.654,-29.022 h1.5 r90
J9: Mechanical 2 "PCB Edge" at -0.14,-26.405 h2 r90
J10: Mechanical 15 "PCB Edge" at -46.654,-66.522 h1.5 r90
J12: Mechanical 15 "PCB Edge" at -46.654,-85.272 h1.5 r90